# Altium PCB ddrlegobrick.PcbDoc (part 1 of 2)
Units mm, origin at the board's own origin, x right, y up, seen from the top; angles counter-clockwise.
Board outline 62 x 30 mm, 4 copper layers (TOP_PWR, POWER, SHIELD_GND, SIGNAL), stack 0.603 mm thick; 97 components, 81 nets, 416 pads, 74 vias.
Unrouted connection lines stored in the file: 270.
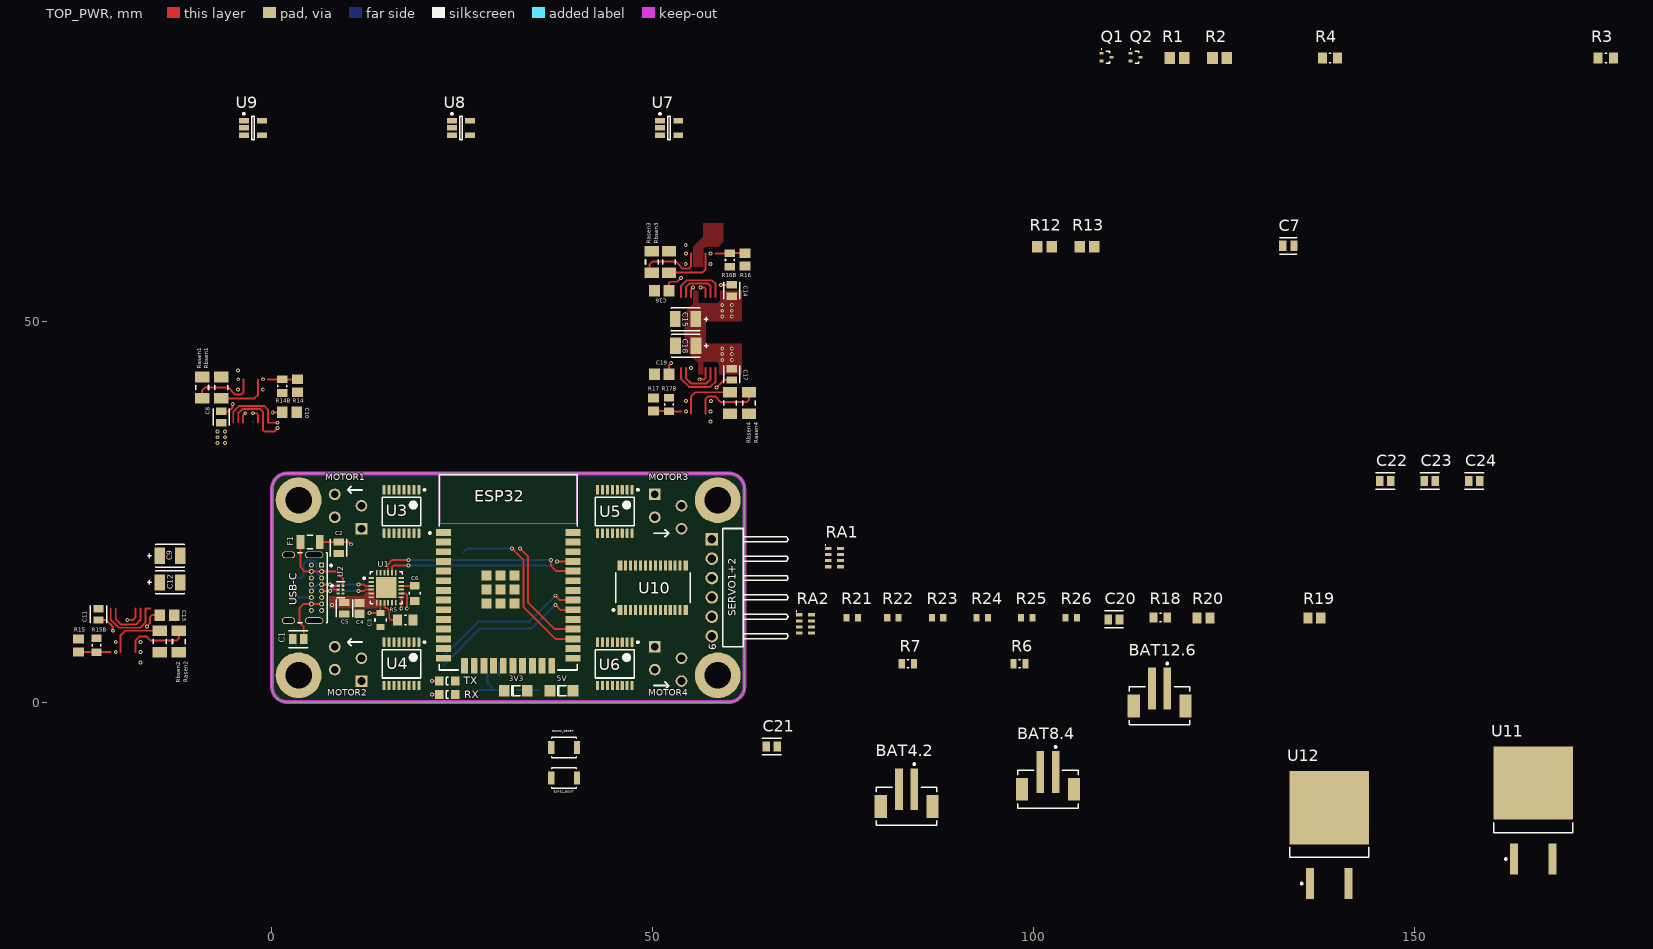
[diagram p0: TOP_PWR view]
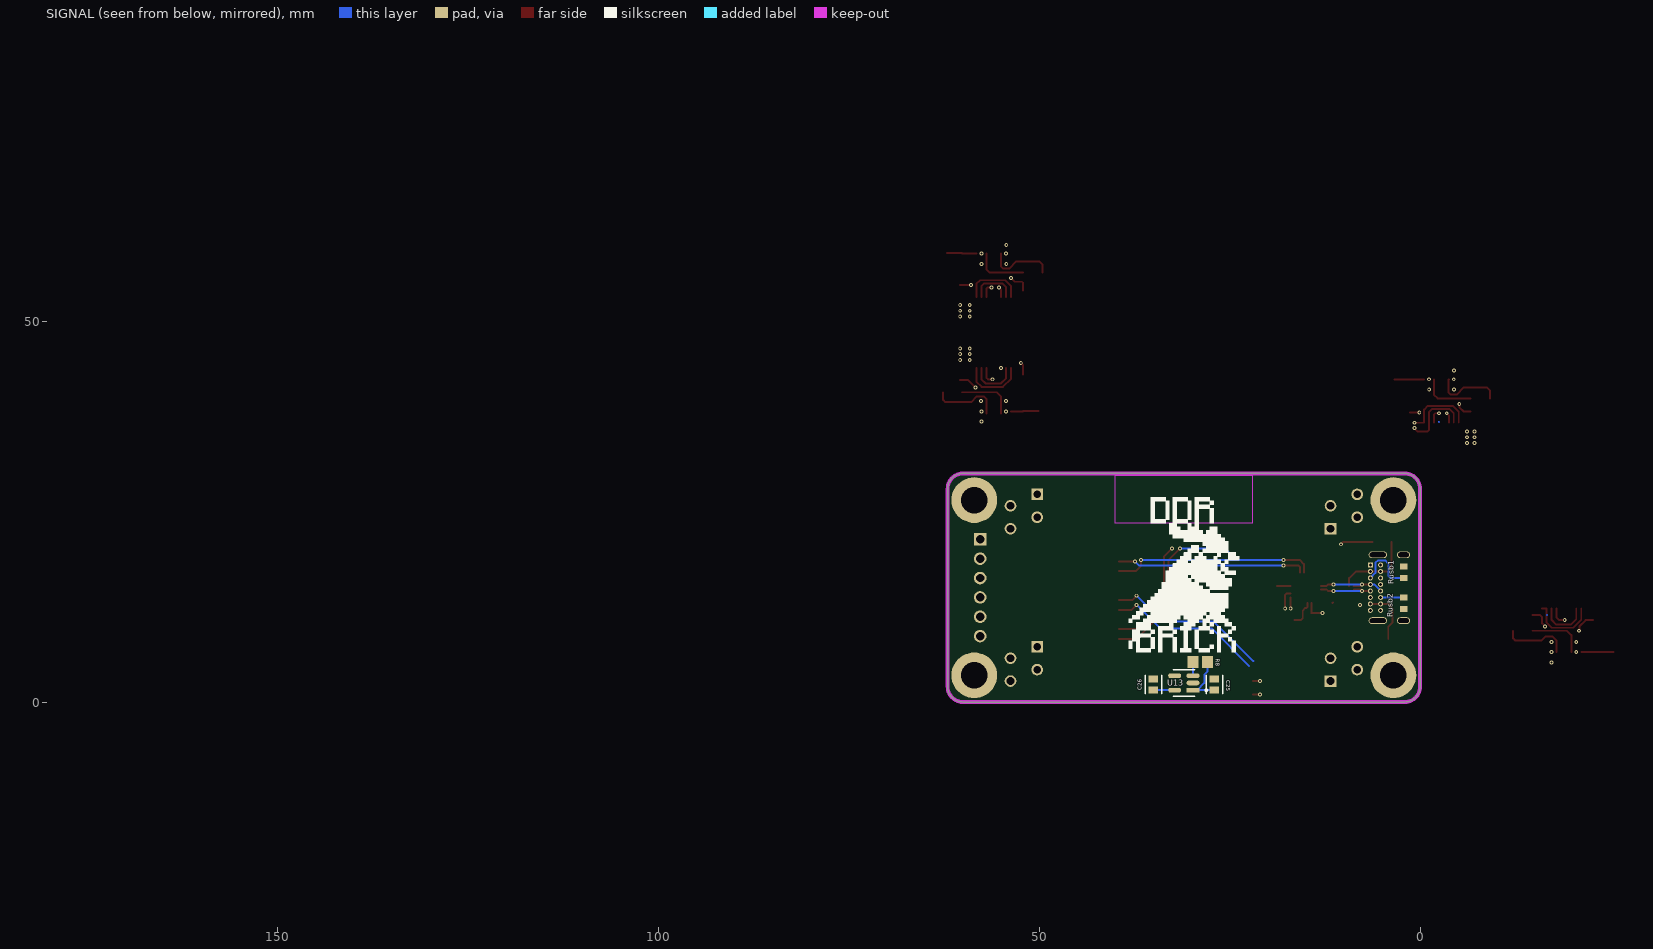
[diagram p1: SIGNAL view, seen from below]
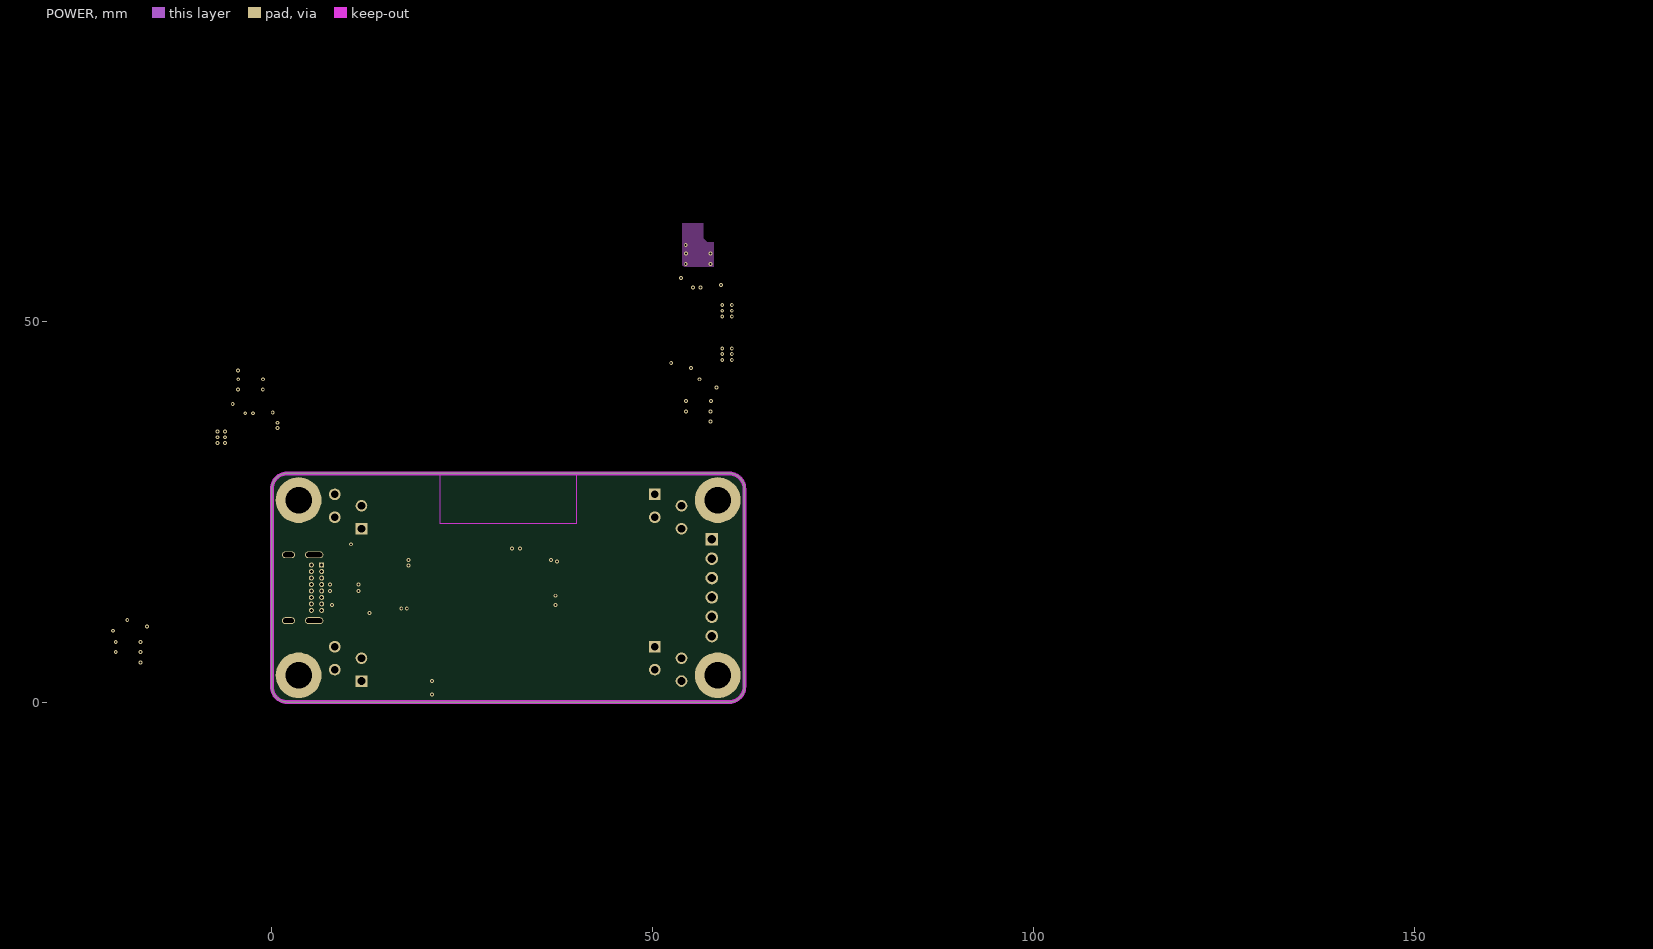
[diagram p2: POWER]
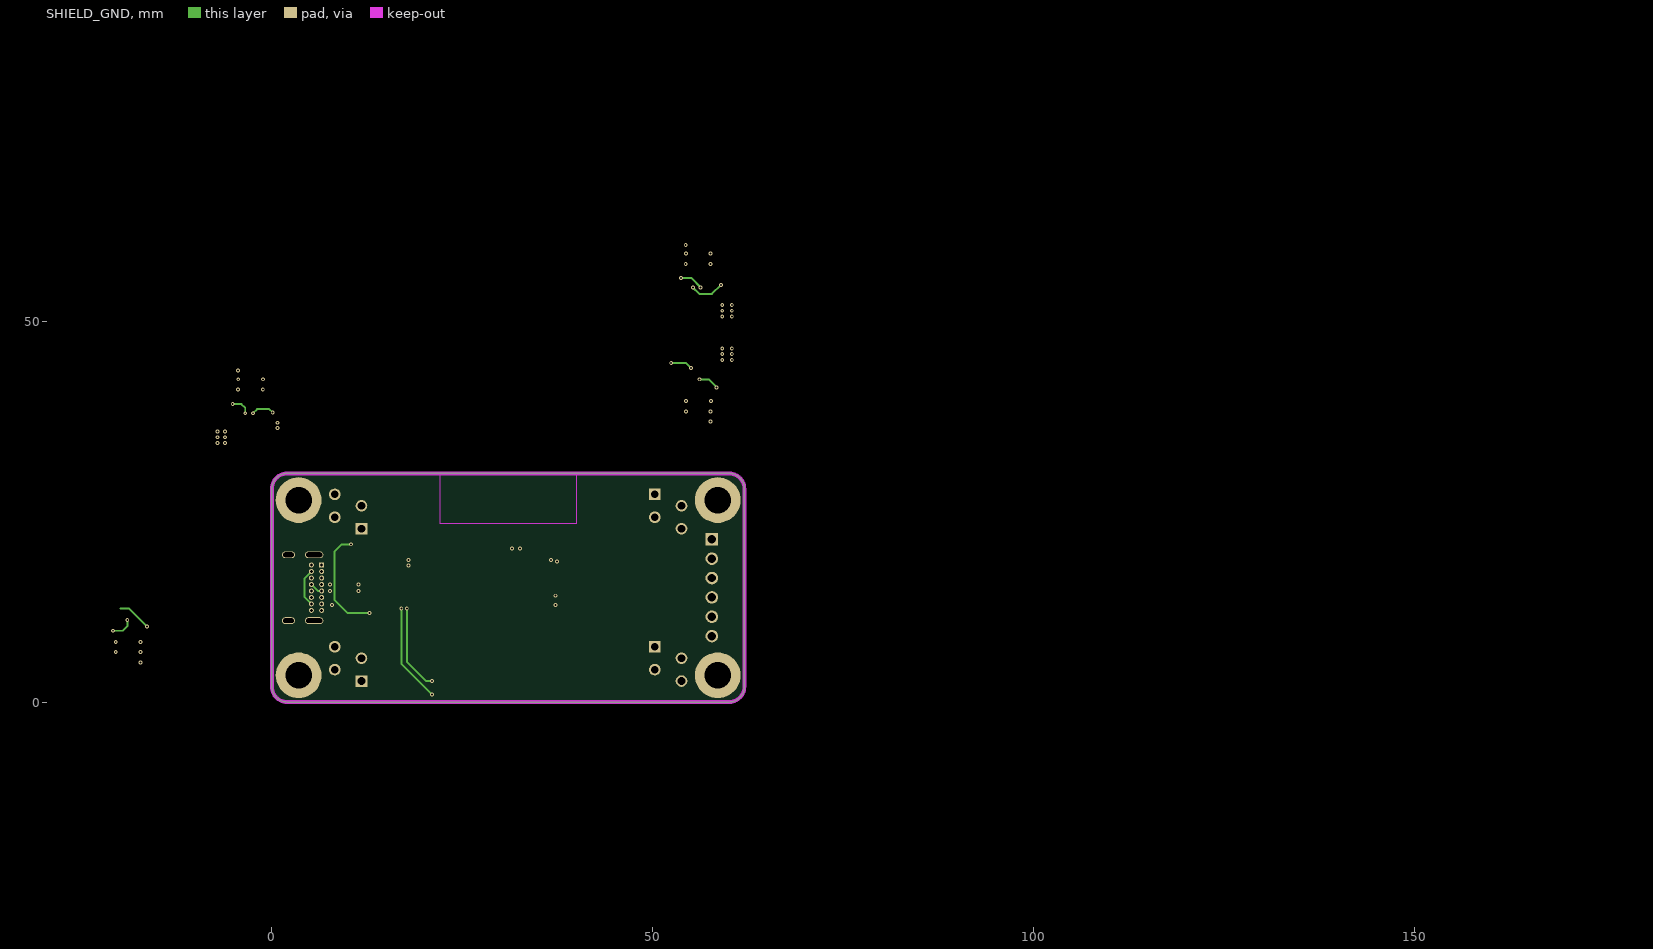
[diagram p3: SHIELD_GND]

## Layer stack, top to bottom
Top Solder: solder mask 0.0102, Solder Resist, Dk 3.5
TOP_PWR: signal copper 0.0356
Dielectric 2: prepreg 0.0711, PP-006, Dk 4.1
POWER: signal copper 0.035
Dielectric 1: dielectric 0.32, FR-4, Dk 4.8
SHIELD_GND: signal copper 0.035
Dielectric 3: prepreg 0.0711, PP-006, Dk 4.1
SIGNAL: signal copper 0.0356
Bottom Solder: solder mask 0.0102, Solder Resist, Dk 3.5

## Board outline
2,30 ccw(c2,28) 0,28 0,2 ccw(c2,2) 2,0 60,0 ccw(c60,2) 62,2 62,28 ccw(c60,28) 60,30

## Design rules (kind name [scope] priority, off if disabled: settings)
Clearance [All] p1: gap=0.127 ignorepadtopadclearanceinfootprint=FALSE
PolygonConnect [All] p1: connectstyle=Direct reliefconductorwidth=0.254 reliefentries=4 polygonreliefangle="90 Angle" airgapwidth=0.254
RoutingVias [All] p1: holewidth=0.711 width=1.27 viastyle="Through Hole" minholewidth=0.711 minwidth=1.27 maxholewidth=0.711 maxwidth=1.27
SolderMaskExpansion [All] p1: expansion=0.102 istentingtop=FALSE
Width [All] p1: maxlimit=3 minlimit=0.127 preferedwidth=0.254 midlayer1_minwidth=0.254 midlayer1_maxwidth=0.254 midlayer2_minwidth=0.254 midlayer2_maxwidth=0.254 minimp=50.000000 maximp=50.000000 favimp=50.000000
30 further rules are at their usual default settings.

## Classes and differential pairs
component class SERVO_DRIVER: C20 R18 R19 R20 R21 R22 R23 R24 R25 R26 RA1 RA2 U10
component class CONN: MOTOR1 MOTOR2 MOTOR3 MOTOR4 SERVO1+2
component class USB-ESP32: 3V3 5V C1 C2 C3 C4 C5 C6 C25 C26 F1 Q1 Q2 R1 R2 R3 R4 R5 R6 R7 R8 Rusb1 Rusb2 RX TX U1 U2 U13 USB-C
component class MOTOR_DRIVER: C8 C9 C10 C11 C12 C13 C14 C15 C16 C17 C18 C19 R14 R14B R15 R15B R16 R16B R17 R17B Rasen1 Rasen2 Rasen3 Rasen4 Rbsen1 Rbsen2 Rbsen3 Rbsen4 U3 U4 U5 U6
component class ESP32: C7 ESP32 ESP32_BOOT ESP32_RESET R12 R13
component class CHARGING: BAT4.2 BAT8.4 BAT12.6 C21 C22 C23 C24 U7 U8 U9 U11 U12

## Components (designator, comment, footprint, x,y, rotation, side; value= is the part's Value field where it differs from the comment)
3V3 "150120GS75000" 1206_A 32,1.5 r0 top
5V "150120GS75000" 1206_A 38,1.5 r0 top
BAT4.2 "B2B-PH-SM4-TB(LF)(SN)" JST-B2B-PH-SM4-TB-2_V 83.3,-13.7 r0 top
BAT8.4 "B2B-PH-SM4-TB(LF)(SN)" JST-B2B-PH-SM4-TB-2_V 101.85,-11.45 r0 top
BAT12.6 "B2B-PH-SM4-TB(LF)(SN)" JST-B2B-PH-SM4-TB-2_V 116.5,-0.5 r0 top
C1 "10uF 25V 0805" FP-GRM21B-0_15-IPC_C 3.449,8.25 r180 top
C2 "0.1uF 50V 0805" FP-C0805C-DN-MFG 8.75,20.25 r270 top value="0.10 μF"
C3 "4.7uF 50V 0805" FP-C2012-125-MFG 14.25,10.75 r270 top value=4.7uF
C4 "1uF 16V 0805" CAPC2013X145X50LL20T25 11.5,12.3 r90 top
C5 "0.1uF 50V 0805" FP-C0805C-DN-MFG 9.5,12.3 r270 top value="0.10 μF"
C6 "4.7uF 16V 0805" FP-0805-L_2_01_0_2-W_1_25-MFG 18.75,14.25 r270 top
C7 "10uF 10V 0805" FP-C0805C-DG-MFG 133.395,59.864 r0 top value=10uF
C8 "10nF 25V 0805" FP-C0805C-DN-MFG -6.65,37.4 r90 top value="10,000 pF"
C9 "10uF 25V 3528" FP-T491B106K025AT-MFG -13.375,19.2 r180 top
C10 "2.2uF 25V 0805" CAPC2013X135X45ML10T25 2.3,38 r180 top
C11 "10nF 25V 0805" FP-C0805C-DN-MFG -22.775,11.5 r270 top value="10,000 pF"
C12 "10uF 25V 3528" FP-T491B106K025AT-MFG -13.375,15.7 r180 top
C13 "2.2uF 25V 0805" CAPC2013X135X45ML10T25 -13.775,11.4 r180 top
C14 "10nF 25V 0805" FP-C0805C-DN-MFG 60.35,54 r90 top value="10,000 pF"
C15 "10uF 25V 3528" FP-T491B106K025AT-MFG 54.275,50.25 r0 top
C16 "2.2uF 25V 0805" CAPC2013X135X45ML10T25 51.15,54 r0 top
C17 "10nF 25V 0805" FP-C0805C-DN-MFG 60.35,43 r270 top value="10,000 pF"
C18 "10uF 25V 3528" FP-T491B106K025AT-MFG 54.3,46.75 r0 top
C19 "2.2uF 25V 0805" CAPC2013X135X45ML10T25 51.15,43 r0 top
C20 "10uF 25V 0805" FP-GRM21B-0_15-IPC_C 110.5,10.85 r0 top
C21 "10uF 25V 0805" FP-GRM21B-0_15-IPC_C 65.6,-5.85 r0 top
C22 "10uF 25V 0805" FP-GRM21B-0_15-IPC_C 146.1,29 r0 top
C23 "10uF 25V 0805" FP-GRM21B-0_15-IPC_C 151.95,29 r0 top
C24 "10uF 25V 0805" FP-GRM21B-0_15-IPC_C 157.8,29 r0 top
C25 "10uF 16V 0805" FP-GRM21B-0_1-IPC_C 27,2.3 r90 bottom
C26 "10uF 16V 0805" FP-GRM21B-0_1-IPC_C 35,2.3 r90 bottom
ESP32 "ESP32-WROOM-32D" FP-ESP32-WROOM-32D-MFG 31,17 r0 top
ESP32_BOOT "B3U-1000P" FP-B3U-1000P-MFG 38.35,-9.95 r180 top
ESP32_RESET "B3U-1000P" FP-B3U-1000P-MFG 38.35,-5.95 r180 top
F1 "0437003.WR" FP-437-MFG 5,21 r0 top value=0.033Ω
MOTOR1 "PF_CONN" PF_CONN 10,25 r270 top
MOTOR2 "PF_CONN" PF_CONN 10,5 r270 top
MOTOR3 "PF_CONN" PF_CONN 52,25 r90 top
MOTOR4 "PF_CONN" PF_CONN 52,5 r90 top
Q1 "MMBT2222ATT1G" ONSC-SC-75-3-463-01_V 109.519,84.629 r0 top
Q2 "MMBT2222ATT1G" ONSC-SC-75-3-463-01_V 113.329,84.629 r0 top
R1 "10K 5% 0805" RESC2013X60X40ML20T25 118.79,84.502 r0 top
R2 "10K 5% 0805" RESC2013X60X40ML20T25 124.378,84.502 r0 top
R3 "1k 5% 0805" RESC2013X60X35ML10T20 175.051,84.502 r0 top
R4 "1k 5% 0805" RESC2013X60X35ML10T20 138.856,84.502 r0 top
R5 "4k7 1% 0805" YAGO-RC0805_M 17.5,10.75 r0 top
R6 "330R 0805" RESC2013X60X35LL10T20 98.1,5 r0 top
R7 "330R 0805" RESC2013X60X35LL10T20 83.45,5 r0 top
R8 "10K 5% 0805" RESC2013X60X40ML20T25 28.85,5.25 r180 bottom
R12 "10K 5% 0805" RESC2013X60X40ML20T25 101.391,59.737 r0 top
R13 "10K 5% 0805" RESC2013X60X40ML20T25 106.979,59.737 r0 top
R14 "220R 5% 0805" RESC2013X60X40NL20T25 3.35,41.5 r90 top
R14B "10k 5% 0805" RESC2013X60X35NL10T20 1.35,41.45 r90 top
R15 "220R 5% 0805" RESC2013X60X40NL20T25 -25.375,7.4 r270 top
R15B "10k 5% 0805" RESC2013X60X35NL10T20 -23.025,7.45 r270 top
R16 "220R 5% 0805" RESC2013X60X40NL20T25 62.1,58.05 r90 top
R16B "10k 5% 0805" RESC2013X60X35NL10T20 60.1,58 r90 top
R17 "220R 5% 0805" RESC2013X60X40NL20T25 50.1,39.05 r270 top
R17B "10k 5% 0805" RESC2013X60X35NL10T20 52.1,39.05 r270 top
R18 "10K 5% 0805" RESC2013X60X35NL10T20 116.6,11.1 r0 top
R19 "220R 5% 0805" RESC2013X60X40NL20T25 136.8,11.05 r0 top
R20 "220R 5% 0805" RESC2013X60X40NL20T25 122.25,11.05 r0 top
R21 "0R 0603 0.1W" RESC1608X55X25ML10T15 76.15,11.05 r0 top
R22 "0R 0603 0.1W" RESC1608X55X25ML10T15 81.5,11.05 r0 top
R23 "0R 0603 0.1W" RESC1608X55X25ML10T15 87.35,11.05 r0 top
R24 "0R 0603 0.1W" RESC1608X55X25ML10T15 93.2,11.05 r0 top
R25 "0R 0603 0.1W" RESC1608X55X25ML10T15 99.05,11.05 r0 top
R26 "0R 0603 0.1W" RESC1608X55X25ML10T15 104.9,11.05 r0 top
RA1 "CAT16-103J4LF" BOUR-CAT16-103J4LF_L 73.8,18.95 r0 top
RA2 "CAT16-103J4LF" BOUR-CAT16-103J4LF_L 70,10.25 r0 top
Rasen1 "0.06 Ohm 1% 1206" RESC3216X89X51NL25T25 -9.15,41.25 r270 top
Rasen2 "0.06 Ohm 1% 1206" RESC3216X89X51NL25T25 -12.225,7.95 r90 top
Rasen3 "0.06 Ohm 1% 1206" RESC3216X89X51NL25T25 49.85,57.75 r270 top
Rasen4 "0.06 Ohm 1% 1206" RESC3216X89X51NL25T25 62.6,39.25 r90 top
Rbsen1 "0.06 Ohm 1% 1206" RESC3216X89X51NL25T25 -6.65,41.25 r270 top
Rbsen2 "0.06 Ohm 1% 1206" RESC3216X89X51NL25T25 -14.725,7.95 r90 top
Rbsen3 "0.06 Ohm 1% 1206" RESC3216X89X51NL25T25 52.1,57.75 r270 top
Rbsen4 "0.06 Ohm 1% 1206" RESC3216X89X51NL25T25 60.1,39.25 r90 top
Rusb1 "5K1 1% 0603" RESC1608X55X25ML10T15 2.165,17.025 r270 bottom
Rusb2 "5K1 1% 0603" RESC1608X55X25ML10T15 2.165,12.975 r90 bottom
RX "150080YS75000" 0805_A 23,1 r0 top
SERVO1+2 "61300611021" 61300611021 60.5,15 r90 top
TX "150080YS75000" 0805_A 23,2.75 r0 top
U1 "CP2104-F03-GM" FP-CP2104-F03-GM-MFG 15,15 r0 top
U2 "TPD4S012DRYR" FP-DRY0006A-MFG 9,14.75 r0 top
U3 "DRV8833PWR" PW0016A_L 17,25 r270 top
U4 "DRV8833PWR" PW0016A_L 17,5 r270 top
U5 "DRV8833PWR" PW0016A_L 45,25 r270 top
U6 "DRV8833PWR" PW0016A_L 45,5 r270 top
U7 "MCP73831T-3ACI/OT" SOT-23-OT5_M 52.124,75.345 r0 top
U8 "MCP73831T-3ACI/OT" SOT-23-OT5_M 24.819,75.345 r0 top
U9 "MCP73831T-3ACI/OT" SOT-23-OT5_M -2.486,75.345 r0 top
U10 "PCA9685PW,112" SOT361-1_V 50,15 r90 top
U11 "L7805CD2T-TR" TO-263_M 165.54,-14.25 r90 top
U12 "L7805CD2T-TR" TO-263_M 138.76,-17.475 r90 top
U13 "AP2112K-3.3TRG1" FP-SOT25-IPC_A 31,2.5 r0 bottom
USB-C "USB4085-GF-A" FP-USB4085-GF-A-MFG 2.5,15 r270 top

## Footprints (in the part's own frame and the unit in brackets; to place one, negate y for a bottom-side part, rotate by r counter-clockwise, add the part's x,y. Pads: shape width x height; smd on the part's side, far side on the other; paste and mask are expansions set on the pad)
0805_A [mm] "Chip LED, 2-Leads, Body 2.0x1.3mm, IPC Medium Density"
  rect 1.1x1.2 smd: 1(-1.05,0) 2(1.05,0)
  silkscreen extent -0.15,-0.5 0.15,0.5, body extent -1,-0.62 1,0.63, height 0.68
1206_A [mm] "Chip LED, 2-Leads, Body 3.2x1.6mm, IPC Medium Density"
  rect 1.4x1.5 smd: 1(-1.5,0) 2(1.5,0)
  silkscreen extent -0.5,-0.66 0.6,0.65, body extent -1.6,-0.8 1.6,0.8, height 0.68
61300611021 [mm] "Pin Header, pitch 2.54 mm, THT, Angled, single row, 6p"
  rect 1.65x1.65 hole 1.1: 1(6.35,2.77)
  round 1.65 hole 1.1: 2(3.81,2.77) 3(1.27,2.77) 4(-1.27,2.77) 5(-3.81,2.77) 6(-6.35,2.77)
  silkscreen extent -7.77,-7.27 7.77,1.35, body extent -7.62,-7.27 7.62,3.09, height 2.58
BOUR-CAT16-103J4LF_L [mm] "Chip Array, 8-Leads, Body 3.4x1.6mm, Pitch 0.8mm, IPC High Density"
  rect 0.9x0.4 smd: 1(-0.8,1.2) 2(-0.8,0.4) 3(-0.8,-0.4) 4(-0.8,-1.2) 5(0.8,-1.2) 6(0.8,-0.4) 7(0.8,0.4) 8(0.8,1.2)
  silkscreen extent -1.19,1.6 -1.09,1.7, body extent -0.95,-1.7 0.95,1.7, height 0.6
CAPC2013X135X45ML10T25 [mm] "Chip Capacitor, 2-Leads, Body 2.00x1.25mm, IPC Low Density"
  rect 1.4x1.5 smd: 1(-0.95,0) 2(0.95,0)
  body extent -1.05,-0.67 1.05,0.67, height 1.35
CAPC2013X145X50LL20T25 [mm] "Chip Capacitor, 2-Leads, Body 2.00x1.25mm, IPC High Density"
  rect 1.1x1.35 smd: 1(-0.7,0) 2(0.7,0)
  body extent -1.1,-0.72 1.1,0.72, height 1.45
FP-437-MFG [mm]
  rect 1x1.8 smd paste+0 mask+0: 1(-1.25,0) 2(1.25,0)
  silkscreen extent -0.38,-0.86 0.38,0.86, body extent -1.85,-1 1.85,1, height 0.25
FP-0805-L_2_01_0_2-W_1_25-MFG [mm]
  rect 1x1.25 smd paste+0 mask+0: 1(-1,0) 2(1,0)
  silkscreen extent -0.13,-0.72 0.13,0.72, body extent -1,-0.63 1,0.63, height 1.52
FP-B3U-1000P-MFG [mm]
  rect 0.8x1.7 smd paste+0 mask+0: 1(-1.7,0) 2(1.7,0)
  silkscreen extent -1.6,-1.35 1.6,1.35, body extent -2.2,-1.45 2.2,1.45, height 0.25
FP-C0805C-DG-MFG [mm]
  rect 0.95x1.35 smd paste+0 mask+0: 1(-0.75,0) 2(0.75,0)
  silkscreen extent -1.11,-1.08 1.1,1.07, body extent -1.4,-0.85 1.4,0.85, height 0.25
FP-C0805C-DN-MFG [mm]
  rect 0.95x1.35 smd paste+0 mask+0: 1(-0.75,0) 2(0.75,0)
  silkscreen extent -1.1,-1.07 1.1,1.07, body extent -1.4,-0.85 1.4,0.85, height 0.25
FP-C2012-125-MFG [mm]
  rect 0.8x1.05 smd paste+0 mask+0: 1(-0.925,0) 2(0.925,0)
  silkscreen extent -0.15,-0.72 0.15,0.72, body extent -1.01,-0.72 0.99,0.73, height 1.45
FP-CP2104-F03-GM-MFG [mm]
  rect 0.7x0.25 smd paste+0 mask+0: 1(-1.975,1.25) 2(-1.975,0.75) 3(-1.975,0.25) 4(-1.975,-0.25) 5(-1.975,-0.75) 6(-1.975,-1.25) 13(1.975,-1.25) 14(1.975,-0.75) 15(1.975,-0.25) 16(1.975,0.25) 17(1.975,0.75) 18(1.975,1.25)
  rect 0.25x0.7 smd paste+0 mask+0: 7(-1.25,-1.975) 8(-0.75,-1.975) 9(-0.25,-1.975) 10(0.25,-1.975) 11(0.75,-1.975) 12(1.25,-1.975) 19(1.25,1.975) 20(0.75,1.975) 21(0.25,1.975) 22(-0.25,1.975) 23(-0.75,1.975) 24(-1.25,1.975)
  rect 2.75x2.75 smd paste-1000 mask+0: 25(0,0)
  silkscreen extent -3.02,-2.07 2.08,2.07, body extent -2.42,-2.42 2.43,2.42, height 0.25
FP-DRY0006A-MFG [mm]
  rrect67% 0.45x0.3 smd paste-1000 mask-1000: 1(-0.275,0.5)
  rrect67% 0.4x0.3 smd paste-1000 mask-1000: 2(-0.3,0) 3(-0.3,-0.5) 4(0.3,-0.5) 5(0.3,0) 6(0.3,0.5)
  silkscreen extent -1.25,-1.05 0.53,1.05, body extent -0.5,-0.72 0.5,0.72, height 0.6
FP-ESP32-WROOM-32D-MFG [mm]
  rect 2x0.9 smd paste+0 mask+0: 1(-8.5,5.26) 2(-8.5,3.99) 3(-8.5,2.72) 4(-8.5,1.45) 5(-8.5,0.18) 6(-8.5,-1.09) 7(-8.5,-2.36) 8(-8.5,-3.63) 9(-8.5,-4.9) 10(-8.5,-6.17) 11(-8.5,-7.44) 12(-8.5,-8.71) 13(-8.5,-9.98) 14(-8.5,-11.25) 25(8.5,-11.25) 26(8.5,-9.98) 27(8.5,-8.71) 28(8.5,-7.44) 29(8.5,-6.17) 30(8.5,-4.9) 31(8.5,-3.63) 32(8.5,-2.36) 33(8.5,-1.09) 34(8.5,0.18) 35(8.5,1.45) 36(8.5,2.72) 37(8.5,3.99) 38(8.5,5.26)
  rect 0.9x2 smd paste+0 mask+0: 15(-5.715,-12.25) 16(-4.445,-12.25) 17(-3.175,-12.25) 18(-1.905,-12.25) 19(-0.635,-12.25) 20(0.635,-12.25) 21(1.905,-12.25) 22(3.175,-12.25) 23(4.445,-12.25) 24(5.715,-12.25)
  rect 1.33x1.33 smd paste+0 mask+0: 39(-2.835,-4.075) 39(-2.835,-2.24) 39(-2.835,-0.405) 39(-1,-4.075) 39(-1,-2.24) 39(-1,-0.405) 39(0.835,-4.075) 39(0.835,-2.24) 39(0.835,-0.405)
  Keep-Out Layer region: -9,6.45 9,6.45 9,12.75 -9,12.75
  Keep-Out Layer region: -9,6.45 9,6.45 9,12.75 -9,12.75
  silkscreen extent -10.4,-12.8 9.05,12.8, body extent -9.6,-13.35 9.6,12.9, height 0.25
FP-GRM21B-0_1-IPC_C [mm]
  rect 0.958x1.262 smd paste+0 mask+0: 1(-0.727,0) 2(0.727,0)
  silkscreen extent -1.21,-1.07 1.21,1.07, body extent -1,-0.63 1,0.63, height 1.35
FP-GRM21B-0_15-IPC_C [mm]
  rect 1.006x1.308 smd paste+0 mask+0: 1(-0.726,0) 2(0.726,0)
  silkscreen extent -1.23,-1.1 1.23,1.1, body extent -1.33,-0.8 1.33,0.8, height 0.25
FP-SOT25-IPC_A [mm]
  rect 1.707x0.616 smd paste+0 mask+0: 1(-1.201,0.95)
  rrect100% 1.707x0.616 smd paste+0 mask+0: 2(-1.201,0) 3(-1.201,-0.95) 4(1.201,-0.95) 5(1.201,0.95)
  silkscreen extent -3.08,-1.75 1.4,1.75, body extent -1.4,-1.47 1.4,1.45, height 1.45
FP-T491B106K025AT-MFG [mm]
  rect 1.42x2.13 smd paste+0 mask+0: 1(-1.35,0) 2(1.35,0)
  silkscreen extent -1.85,-1.5 2.95,1.5, body extent -2.18,-1.62 2.18,1.62, height 0.25
FP-USB4085-GF-A-MFG [mm]
  rrect100% 0.9x2.4 hole 2.1 slot 0.6 at 0 deg paste-1000 mask+0: 1(-4.325,3.045) 2(4.325,3.045)
  rrect100% 0.9x1.7 hole 1.4 slot 0.6 at 0 deg paste-1000 mask+0: 3(-4.325,-0.335) 4(4.325,-0.335)
  rect 0.65x0.65 hole 0.4 paste-1000 mask+0: A1(-2.975,4.025)
  round 0.65 hole 0.4 paste-1000 mask+0: A4(-2.125,4.025) A5(-1.275,4.025) A6(-0.425,4.025) A7(0.425,4.025) A8(1.275,4.025) A9(2.125,4.025) A12(2.975,4.025) B1(2.975,2.675) B4(2.125,2.675) B5(1.275,2.675) B6(0.425,2.675) B7(-0.425,2.675) B8(-1.275,2.675) B9(-2.125,2.675) B12(-2.975,2.675)
  silkscreen extent -4.57,0.89 4.57,5.4, body extent -4.87,-4.83 4.87,4.83, height 0.25
JST-B2B-PH-SM4-TB-2_V [mm] "SMD, 2-Leads, Body 7.95x5mm, Pitch 2mm"
  rect 1x5.5 smd: 1(1,2.25) 2(-1,2.25)
  rect 1.6x3 smd: MP1(3.4,0) MP2(-3.4,0)
  silkscreen extent -3.98,-2.5 3.98,5.67, body extent -3.97,-2.5 3.97,4.5, height 6.6
ONSC-SC-75-3-463-01_V [mil] "SOT23, 3-Leads, Body 1.6x0.8mm, Pitch 0.5mm"
  rect 20x14.02 smd: 1(-25.49,19.68) 2(-25.49,-19.69) 3(25.49,0)
  silkscreen extent -27,-31 16,44, body extent -16,-31 16,31, height 35
PF_CONN [mm] "PF connector based on the RC brick design"
  round 1.524 hole 1: C1(-0.75,1.75) C2(0.75,-1.75) GND(-2.25,-1.75)
  rect 1.524x1.524 hole 1: VCC(2.25,1.75)
  silkscreen extent -3.3,-0.05 -2.4,1.85, body extent -3.52,-3.02 3.52,3.02, height 8.38
PW0016A_L [mm] "SOP, 16-Leads, Body 5.1x4.5mm, Pitch 0.65mm, IPC High Density"
  rrect25% 1.2x0.4 smd: 1(-2.85,2.275) 2(-2.85,1.625) 3(-2.85,0.975) 4(-2.85,0.325) 5(-2.85,-0.325) 6(-2.85,-0.975) 7(-2.85,-1.625) 8(-2.85,-2.275) 9(2.85,-2.275) 10(2.85,-1.625) 11(2.85,-0.975) 12(2.85,-0.325) 13(2.85,0.325) 14(2.85,0.975) 15(2.85,1.625) 16(2.85,2.275)
  silkscreen extent -2.97,-2.55 1.85,3.15, body extent -3.21,-2.5 3.21,2.5, height 1
RESC1608X55X25ML10T15 [mm] "Chip Resistor, 2-Leads, Body 1.60x0.80mm, IPC Low Density"
  rect 0.8x1 smd: 1(-0.75,0) 2(0.75,0)
  body extent -0.85,-0.45 0.85,0.45, height 0.55
RESC2013X60X35LL10T20 [mm] "Chip Resistor, 2-Leads, Body 2.1x1.35mm, IPC High Density"
  rect 0.8x1.25 smd: 1(-0.8,0) 2(0.8,0)
  silkscreen extent -0.1,-0.53 0.1,0.53, body extent -1.05,-0.67 1.05,0.68, height 0.6
RESC2013X60X35ML10T20 [mm] "Chip Resistor, 2-Leads, Body 2.1x1.35mm, IPC Low Density"
  rect 1.2x1.45 smd: 1(-1,0) 2(1,0)
  silkscreen extent -0.1,-0.63 0.1,0.63, body extent -1.05,-0.68 1.05,0.67, height 0.6
RESC2013X60X35NL10T20 [mm] "Chip Resistor, 2-Leads, Body 2.1x1.35mm, IPC Medium Density"
  rect 1x1.35 smd: 1(-0.9,0) 2(0.9,0)
  silkscreen extent -0.1,-0.58 0.1,0.58, body extent -1.05,-0.68 1.05,0.67, height 0.6
RESC2013X60X40ML20T25 [mm] "Chip Resistor, 2-Leads, Body 2.00x1.25mm, IPC Low Density"
  rect 1.4x1.55 smd: 1(-0.95,0) 2(0.95,0)
  body extent -1.1,-0.72 1.1,0.72, height 0.6
RESC2013X60X40NL20T25 [mm] "Chip Resistor, 2-Leads, Body 2.00x1.25mm, IPC Medium Density"
  rect 1.2x1.45 smd: 1(-0.85,0) 2(0.85,0)
  body extent -1.1,-0.72 1.1,0.72, height 0.6
RESC3216X89X51NL25T25 [mm] "Chip Resistor, 2-Leads, Body 3.20x1.60mm, IPC Medium Density"
  rect 1.4x1.85 smd: 1(-1.4,0) 2(1.4,0)
  silkscreen extent -0.3,-0.82 0.3,0.82, body extent -1.73,-0.92 1.73,0.92, height 0.89
SOT361-1_V [mm] "SOP, 28-Leads, Body 9.7x4.4mm, Pitch 0.65mm, NXP Recommended"
  rect 1.35x0.6 smd: 1(-2.925,4.325) 14(-2.925,-4.325) 15(2.925,-4.325) 28(2.925,4.325)
  rect 1.35x0.4 smd: 2(-2.925,3.575) 3(-2.925,2.925) 4(-2.925,2.275) 5(-2.925,1.625) 6(-2.925,0.975) 7(-2.925,0.325) 8(-2.925,-0.325) 9(-2.925,-0.975) 10(-2.925,-1.625) 11(-2.925,-2.275) 12(-2.925,-2.925) 13(-2.925,-3.575) 16(2.925,-3.575) 17(2.925,-2.925) 18(2.925,-2.275) 19(2.925,-1.625) 20(2.925,-0.975) 21(2.925,-0.325) 22(2.925,0.325) 23(2.925,0.975) 24(2.925,1.625) 25(2.925,2.275) 26(2.925,2.925) 27(2.925,3.575)
  silkscreen extent -3.05,-4.9 1.96,5.3, body extent -2.2,-4.85 2.2,4.85, height 1.1
SOT-23-OT5_M [mm] "SOT23, 5-Leads, Body 2.9x1.7mm, Pitch 0.95mm, Lead Span 2.8mm, IPC Low Density"
  rect 1.3x0.7 smd: 1(-1.2,0.95) 2(-1.2,0) 3(-1.2,-0.95) 4(1.2,-0.95) 5(1.2,0.95)
  silkscreen extent -1.32,-1.55 0.15,1.97, body extent -0.9,-1.55 0.9,1.55, height 1.45
TO-263_M [mm] "D2-PAK, 4-Leads, Body 9.2x10.2mm, Pitch 2.54mm, Lead Span 15.4mm, IPC Low Density"
  rect 4.1x1.05 smd: 1(-6.35,2.54) 3(-6.35,-2.54)
  rect 9.6x10.45 smd: 4(3.6,0)
  silkscreen extent -6.47,-5.2 -1.6,5.2, body extent -2.9,-5.2 6.45,5.2, height 4.6
YAGO-RC0805_M [mm] "Chip Resistor, 2-Leads, Body 2.00x1.25mm, IPC Low Density"
  rect 1.2x1.45 smd: 1(-1,0) 2(1,0)
  silkscreen extent -0.1,-0.63 0.1,0.63, body extent -1,-0.62 1,0.63, height 0.6

## Part data
3V3 5V: library part CMP-1426-00014-1, "SMD mono-color Chip LED, WL-SMCW, Green", Color=Green, Manufacturer="Wuerth Elektronik", ComponentLink1Description="Manufacturer URL", ComponentLink1URL=http://www.we-online.com, ComponentLink2Description=Datasheet, ComponentLink2URL=http://katalog.we-online.com/led/datasheet/150120GS75000.pdf, PackageReference=1206_A, PartNumber=150120GS75000
BAT4.2 BAT8.4 BAT12.6: library part CMP-2000-05163-1, "Male Header, Pitch 2 mm, 1 x 2 Position, Height 6.6 mm, RoHS, Tape and Reel", Manufacturer=JST, Datasheet URL=https://ciiva.com/datasheet-click-26894756?src=ciiva&sig=90099765, Datasheet Version=Dec-12, Manufacturer URL=http://www.jst.com/home2.html, No of Positions=2, Pitch=2mm, Style/Orientation=StraightHeader/Plug, Termination=Crimp, Type=ShroudedHeader
C1 C20 C21 C22 C23 C24: library part CMP-2007-03541-2, "Chip Multilayer Ceramic Capacitors for General Purpose, 0805, 10uF, X5R, 15%, 10%, 25V", Capacitance=10uF, Case Code (Imperial)=0805, Case Code (Metric)=2012, Dielectric=X5R, Max Operating Temperature=85°C, Min Operating Temperature=-55°C, Package Quantity=1, Tolerance=10%, Voltage=25V, Case/Package=0805, Depth=1.25mm, Height=1.25mm, Lead Free="Lead Free", Length=2mm, Material=Ceramic, Mount="Surface Mount", Packaging="Tape and Reel", Radiation Hardening=No, Termination=SMD/SMT, Thickness=0.053inch, Voltage Rating=25V, Voltage Rating (DC)=25V, Width=0.049inch
C2 C5: library part CMP-2007-00279-2, "CAP CER 0.1UF 50V X7R 0805", Capacitance="0.10 μF", Manufacturer=KEMET, Manufacturer Part Number=C0805C104K5RACTU, Package=C0805C-DN, Temperature="-55°C to +125°C", Temperature Characteristic=X7R, Temperature Coefficient=30ppm/°C, Temperature Range High=+125°C, Temperature Range Low=-55°C, Tolerance=0.1, Voltage Rating="50 V", Automotive=No, Category=Cap, ComponentLink2Description=Datasheet, ComponentLink2URL=https://content.kemet.com/datasheets/KEM_C1003_C0G_SMD.pdf, Device Class L1="Passive Components", Device Class L2=Capacitors, Device Class L3="Ceramic Capacitors", Digikey Description="CAP CER 0.1UF 50V X7R 0805", Height=0.88mm, Ipc Land Pattern Name=CAPC200125X78, Lead Free=Yes, Material=Ceramic, Mouser Description="Cap Ceramic 0.1uF 50V X7R 10% SMD 2.0 x 1.2 mm 125 C Paper T/R", Octopart=https://octopart.com/c0805c104k5ractu-kemet-143926, RoHS=TRUE
C3: library part CMP-08246-000007-1, "CAP CER 4.7UF 50V X5R 0805", Capacitance=4.7uF, Manufacturer="TDK Corporation", Manufacturer Part Number=C2012X5R1H475K125AB, Package=C2012-125, Temperature="-55°C to +85°C", Temperature Characteristic=X5R, Temperature Coefficient=15%, Temperature Range High=+85°C, Temperature Range Low=-55°C, Tolerance=10%, Voltage Rating=50V, Automotive=No, Category=Cap, ComponentLink2Description=Datasheet, ComponentLink2URL=https://product.tdk.com/info/en/catalog/datasheets/mlcc_commercial_general_en.pdf, Device Class L1="Passive Components", Device Class L2=Capacitors, Device Class L3="Ceramic Capacitors", Digikey Description="CAP CER 4.7UF 50V X5R 0805", Height=1.45mm, Lead Free=Yes, Material=Ceramic, Mouser Description="Multilayer Ceramic Capacitors MLCC - SMD/SMT 0805 4.7uF 50volts X5R 10%", Octopart=https://octopart.com/c2012x5r1h475k125ab-tdk-25947720, RoHS=TRUE
C4: library part CMP-1036-04746-2, Manufacturer=Kemet, Part Number=C0805C105K4PACTU
C6: library part CMP-2007-04518-2, "General Purpose Ceramic Capacitor, 0805, 4.7uF, 10%, X7R, 15%, 16V", Capacitance=4.7uF, Case Code (Imperial)=0805, Case Code (Metric)=2012, Dielectric=X7R, Max Operating Temperature=125°C, Min Operating Temperature=-55°C, Package Quantity=1, Tolerance=10%, Voltage=10V, Voltage Rating=16V, Case/Package=0805, Construction=Flat, Contact Plating=Tin, Depth=1.25mm, Dissipation Factor=3.5%, Height=1.52mm, Lead Free="Lead Free", Length=2.01mm, Mount="Surface Mount", Number of Pins=2, Packaging="Tape and Reel", Radiation Hardening=No, REACH SVHC="No SVHC", RoHS Compliant=Yes, Series=-, Termination=SMD/SMT, Thickness=0.06inch, Voltage Rating (DC)=16V, Width=0.049inch
C7: library part CMP-2007-03243-2, "CAP CER 10UF 10V X5R 0805", 3DS Part Number=220-00001, Capacitance=10uF, Manufacturer=Kemet, Manufacturer Part Number=C0805C106K8PACTU, Package=C0805C-DG, Temperature="-55°C to +85°C", Temperature Characteristic=X5R, Temperature Coefficient=15%, Temperature Range High=+85°C, Temperature Range Low=-55°C, Tolerance=10%, Voltage=10V, Automotive=No, Category=Cap, ComponentLink2Description=Datasheet, ComponentLink2URL=https://content.kemet.com/datasheets/KEM_C1006_X5R_SMD.pdf, Device Class L1="Passive Components", Device Class L2=Capacitors, Device Class L3="Ceramic Capacitors", Digikey Description="CAP CER 10UF 10V X5R 0805", Height=1.4mm, Ipc Land Pattern Name=CAPC200125X125, Lead Free=Yes, Material=Ceramic, Mouser Description="CAP CER 10UF 10V X5R 0805", Octopart=https://octopart.com/c0805c106k8pactu-kemet-98697, RoHS=TRUE, Voltage Rating=10V
C8 C11 C14 C17: library part CMP-2007-00493-2, "CAP CER 10000PF 25V 5% NP0 0805", Capacitance="10,000 pF", Manufacturer=KEMET, Manufacturer Part Number=C0805C103J3GACTU, Package=C0805C-DN, Temperature="-55°C to +125°C", Temperature Characteristic=C0G, Temperature Coefficient=30ppm/°C, Temperature Range High=+125°C, Temperature Range Low=-55°C, Tolerance=0.05, Voltage Rating="25 V", Automotive=No, Category=Cap, ComponentLink2Description=Datasheet, ComponentLink2URL=https://content.kemet.com/datasheets/KEM_C1003_C0G_SMD.pdf, Device Class L1="Passive Components", Device Class L2=Capacitors, Device Class L3="Ceramic Capacitors", Digikey Description="CAP CER 10000PF 25V 5% NP0 0805", Height=0.88mm, Ipc Land Pattern Name=CAPC200125X78, Lead Free=Yes, Material=Ceramic, Mouser Description="Multilayer Ceramic Capacitors MLCC - SMD/SMT 25volts 10000pF 5% C0G", Octopart=https://octopart.com/c0805c103j3gactu-kemet-12563663, RoHS=TRUE
C9 C12 C15 C18: library part CMP-03017-000036-1, "CAP TANT 10UF 10% 25V 1411", Capacitance=10uF, Case Code (Imperial)=1411, Case Code (Metric)=3528, Dielectric Material=Tantalum, ESR (Equivalent Series Resistance)=3R, Leakage Current=2.5uA, Max Operating Temperature=125°C, Min Operating Temperature=-55°C, Package Quantity=1, Ripple Current=168mA, Tolerance=10%, Voltage=25V, Case/Package=1411, Construction=Flat, Depth=2.8mm, Dissipation Factor=8%, Features="General Purpose", Height=1.9mm, Height - Seated (Max)=0.083inch, Lead Free="Lead Free", Length=3.5mm, Life (Hours)=2000Hour, Mount="Surface Mount", Number of Pins=2, Packaging="Tape and Reel", Polarity=Polar, Radiation Hardening=No, REACH SVHC="No SVHC", RoHS Compliant=Yes, Series=T491, Termination=SMD/SMT, Voltage Rating=25V, Voltage Rating (DC)=25V, Width=0.11inch
C10 C13 C16 C19: library part CMP-2007-03522-1, Manufacturer=Murata, Part Number=GRM21BF51E225ZA01L
C25 C26: library part CMP-2007-03453-2, "Chip Multilayer Ceramic Capacitors for General Purpose, 0805, 10uF, X5R, 15%, 10%, 16V", Capacitance=10uF, Case Code (Imperial)=0805, Case Code (Metric)=2012, Dielectric=X5R, Max Operating Temperature=85°C, Min Operating Temperature=-55°C, Package Quantity=1, Tolerance=10%, Voltage=16V, Case/Package=0805, Depth=1.25mm, Height=1.25mm, Lead Free="Lead Free", Length=2mm, Material=Ceramic, Mount="Surface Mount", Packaging="Tape and Reel", Radiation Hardening=No, REACH SVHC="No SVHC", Termination=SMD/SMT, Thickness=0.053inch, Voltage Rating=16V, Voltage Rating (DC)=16V, Width=1.25mm
ESP32: library part CMP-194065-000003-1, "WIFI MODULE 32MBITS SPI FLASH", Manufacturer="Espressif Systems", Max Frequency=2484MHz, Max Supply Voltage=3.6V, Min Supply Voltage=3V, Nominal Supply Current=500mA, Temperature="-40°C to +85°C", Temperature Range High=+85°C, Temperature Range Low=-40°C, Automotive=No, Bandwidth=72MHz, Category=UNK, ComponentLink2Description=Datasheet, ComponentLink2URL=https://www.espressif.com/sites/default/files/documentation/esp32-wroom-32d_esp32-wroom-32u_datasheet_en.pdf, Data Rate=150Mbits/s, Device Class L1="Integrated Circuits (ICs)", Device Class L2="RF Semiconductors and Devices", Device Class L3=Transceivers, Digikey Description="WIFI MODULE 32MBITS SPI FLASH", Height=3.2mm, Interface=I2C,SPI,UART,Ethernet,I2S,Other, Lead Free=Yes, Manufacturer Part Number=ESP32-WROOM-32D, Mouser Description="Wi-Fi/BT BLE Module ESP32-D0WD, SPI Flash, UART, P", Number Of Adc Channels=16, Number Of Gpio=32, Octopart=https://octopart.com/esp32-wroom-32d-espressif+systems-91040050, Package=ESP32-WROOM-32D, RoHS=TRUE, Sensitivity=-98dBm
ESP32_BOOT ESP32_RESET: library part CMP-2100-03586-2, "SWITCH TACTILE SPST-NO 0.05A 12V", Contact Current Rating=50mA, Contact Resistance=100mR, Insulation Resistance=100MR, Max Operating Temperature=70°C, Max Voltage Rating (DC)=12V, Min Operating Temperature=-25°C, Operating Force=1.5N, Package Quantity=1, Ratings="Dust Proof", Actuator Length=0.4mm, Actuator Type=Standard, Contact Material=Silver, Current Rating=50mA, Depth=2.5mm, Electrical Life=200000Cycles, Height=1.2mm, Illumination Type=Non-Illuminated, Lead Free="Lead Free", Length=4mm, Max Current Rating=50mA, Mechanical Life=200000Cycles, Mount="Surface Mount", Orientation=Straight, Packaging="Tape and Reel", Switch Function=Off-Mom, Switch Travel=0.15mm, Termination=SMD/SMT, Throw Configuration=SPST, Voltage Rating (DC)=12V, Weight=0.000776oz, Width=3mm
F1: library part CMP-08605-000049-1, "FUSE BRD MNT 3A 32VAC 35VDC 1206", Fuse Current=3A, Fuse Interrupt Ac Current=50A, Fuse Voltage Drop=0.14V, Manufacturer="Littelfuse Inc", Max Fuse Ac Voltage=32V, Max Fuse Dc Voltage=35V, Package=437, Resistance=0.033Ω, Temperature="-55°C to +150°C", Temperature Range High=+150°C, Temperature Range Low=-55°C, Automotive=No, Category=Fuse, ComponentLink2Description=Datasheet, ComponentLink2URL=https://www.littelfuse.com/~/media/electronics/datasheets/fuses/littelfuse_fuse_437_datasheet.pdf.pdf, Device Class L1="Circuit Protection", Device Class L2=Fuses, Device Class L3=unset, Digikey Description="FUSE BRD MNT 3A 32VAC 35VDC 1206", Fuse Blow Speed=Fast, Fuse I2T=0.506A2Sec, Fuse Interrupt Dc Current=50A, Height=0.8639mm, Ipc Land Pattern Name=CAPC320163X82, Lead Free=Yes, Manufacturer Part Number=0437003.WR, Mouser Description="Surface Mount Fuses 32V FA 1206 3A", Octopart=https://octopart.com/0437003.wr-littelfuse-8600121, RoHS=TRUE, Voltage Rating=32V
Q1 Q2: library part CMP-1048-00417-1, "General Purpose Transistor, NPN Silicon, 3-Pin SC-75, Pb-Free, Tape and Reel", Manufacturer="On Semiconductor", ComponentLink1Description="Manufacturer URL", ComponentLink1URL=http://www.onsemi.com/, ComponentLink2Description=Datasheet, ComponentLink2URL=http://www.onsemi.cn/pub_link/Collateral/MMBT2222ATT1-D.PDF, ComponentLink3Description="Package Specification", ComponentLink3URL=http://www.onsemi.com/pub_link/Collateral/463-01.PDF, DatasheetVersion="Rev. 5", fT Min (MHz)=300, IC Continuous (A)=0.6, Mounting Technology="Surface Mount", PackageDescription="3-Pin Small Outline Transistor, Body 1.6 x 0.8 mm, Pitch 0.5 mm", PackageReference=SC-75-3-463-01, PackageVersion="Rev. F, 07/2005", Packing="Tape and Reel", PartNumber=MMBT2222ATT1G, Polarity=NPN, RoHS=TRUE
R1 R2 R8 R12 R13: library part CMP-2001-00590-1, Manufacturer=Panasonic, Part Number=ERA6AEB123V
R3 R4: library part CMP-2100-03671-1, "Chip Resistor, 1 KOhm, +/- 1%, 125 mW, -55 to 155 degC, 0805 (2012 Metric), RoHS, Tape and Reel", Case Code (Imperial)=0805, Case Code (Metric)=2012, Manufacturer=Yageo, Max Operating Temperature=155degC, Max Power Dissipation=125mW, Min Operating Temperature=-55degC, Package Description="2-Pin Surface Mounted Device, Body 2 x 1.25 mm", Package Quantity=1, Resistance=1KOhm, Temperature Coefficient=100ppm/degreesC, Tolerance=1%, Voltage Rating=150V, Case/Package=0805, Composition=ThickFilm, Datasheet URL=http://www.yageo.com/NewPortal/yageodocoutput?fileName=/pdf/R-Chip/PYu-RC_Group_51_RoHS_L_5.pdf, Datasheet Version="Rev. 5, 10/2016", Depth=1.25mm, Height=0.024inch, Lead Free=LeadFree, Length=0.079inch, Manufacturer URL=http://www.yageo.com/, Military Standard=Not, Number of Pins=2, Number of Terminations=2, Package Reference=0805, Packaging=TapeandReel, Power Rating=125mW, REACH SVHC=Unknown, RoHSCompliant=true, Termination=SMD/SMT, Voltage Rating (DC)=150V, Width=0.049inch
R5: library part CMP-1568-00001-1, "General Puprose Chip Resistor, 4700 Ohm +/- 1%, 0.125 W, -55 to 155 degC, 2-Pin SMD, RoHS, Tape and Reel", PartNumber=RC0805FR-074K7L, Power="0.125 W", Resistance="4700 Ohm", Temperature Max="155 degC", Temperature Min="-55 degC", Tolerance="+/- 1%", ComponentLink1Description="Manufacturer URL", ComponentLink1URL=http://www.yageo.com/NewPortal/_en/index.jsp, ComponentLink2Description=Datasheet, ComponentLink2URL=http://www.yageo.com/documents/recent/PYu-RC_Group_51_RoHS_L-3.pdf, DatasheetVersion="Rev. 3", Mounting Technology="Surface Mount", PackageDescription="2-Pin Surface Mount Device, Body 2 x 1.25 mm", Packing="Tape and Reel", RoHS=TRUE
R6 R7: library part CMP-2000-06960-1, "Chip Resistor, 330 Ohm, +/- 1%, 125 mW, -55 to 155 degC, 0805 (2012 Metric), RoHS, Tape and Reel", Case Code - in=0805, Case Code - mm=2012, Manufacturer=Yageo, Operating Temperature Range=-55Cto+155C, Package Description="2-Pin Surface Mounted Device, Body 2 x 1.25 mm", Power Rating=125mW(1/8W), Resistance=330Ohms, Temperature Coefficient=100PPM/C, Tolerance=1%, Voltage Rating=150V, Datasheet URL=http://www.yageo.com/documents/recent/PYu-RC_Group_51_RoHS_L_7.pdf, Datasheet Version="Rev. 7, 05/2017", Manufacturer URL=http://www.yageo.com/, Mounting Technology=SurfaceMount, Package Reference=0805, Packaging=Reel, Product=ThickFilmResistorsGeneralPurpose, Series=RC, Termination Style=SMD/SMT
R14 R15 R16 R17 R19 R20: library part CMP-2001-00612-1, Manufacturer=Panasonic, Part Number=ERA6AEB221V
R14B R15B R16B R17B R18: library part CMP-1659-00013-4, "Chip Resistor, 10 KOhm, +/- 1%, 0.125 W, -55 to 155 degC, 0805 (2012 Metric), RoHS, Tape and Reel", Manufacturer=Yageo, Max Operating Temperature="155 degC", Min Operating Temperature="-55 degC", Package Quantity=5000, Voltage Rating="150 V", ComponentLink1Description="Manufacturer URL", ComponentLink1URL=http://www.yageo.com/, ComponentLink2Description=Datasheet, ComponentLink2URL=http://www.yageo.com/documents/recent/PYu-RC_Group_51_RoHS_L_04.pdf, DatasheetVersion="Rev. 4, 02/2016", Height="0.5 mm", Length="2 mm", Mount="Surface Mount", Mounting Technology="Surface Mount", PackageDescription="2-Pin Surface Mounted Device, Body 2 x 1.25 mm", PackageReference=0805, Packaging="Tape and Reel", Pins=2, REACH SVHC="No SVHC", RoHSCompliant=true
R21 R22 R23 R24 R25 R26: library part CMP-2100-03667-1, "Chip Resistor, 0 Ohm, +/- 5%, 0.1 W, -55 to 155 degC, 0603 (1608 Metric), RoHS, Tape and Reel", Case Code (Imperial)=0603, Case Code (Metric)=1608, Manufacturer=Yageo, Max Operating Temperature=155degC, Min Operating Temperature=-55degC, Package Description="2-Pin Surface Mount Device, Body 1.6 x 0.8 mm", Package Quantity=5000, Power Rating=100mW, Resistance=0mOhm, Temperature Coefficient=200ppm/degreesC, Tolerance=5%, Voltage Rating=50V, Case/Package=0603, Composition=ThickFilm, Contact Plating=Tin, Datasheet URL=http://www.yageo.com/NewPortal/yageodocoutput?fileName=/pdf/R-Chip/PYu-RC_Group_51_RoHS_L_5.pdf, Datasheet Version="Rev. 5, 10/2016", Depth=0.8mm, Height=0.45mm, Lead Free=LeadFree, Length=1.6mm, Manufacturer URL=http://www.yageo.com/, Military Standard=Not, Number of Pins=2, Package Reference=0603, Packaging=TapeandReel, Radiation Hardening=No, REACH SVHC=NoSVHC, RoHSCompliant=true, Termination=SMD/SMT, Voltage Rating (DC)=50V, Width=0.8mm
RA1 RA2: library part CMP-2000-06067-1, "CAT / CAY 16 Series - Chip Resistor Array, 10 KOhm, +/- 5%, 50 V, -55 to 125 degC, 8-Pin SMD, RoHS, Tape and Reel", Manufacturer=Bourns, Number of Resistors=4, Operating Temperature=-55°C~125°C, Package / Case=1206(3216Metric),Concave,LongSideTerminals, Package Description="8-Pin Surface Mount Device, Body 3.2 x 1.55 mm, Pitch 0.8 mm", Power Per Element=62.5mW, Resistance (Ohms)=10k, Standard Package=1, Supplier Device Package=1206, Temperature Coefficient=±200ppm/°C, Tolerance=±5%, Applications=-, Category=Resistors, Circuit Type=Isolated, Datasheet URL=http://www.mouser.com/ds/2/54/ATCAY-777361.pdf, Datasheet Version=09/2014, EDA / CAD Models=DownloadfromAcceleratedDesigns, Family=ResistorNetworks,Arrays, Height="0.024\"(0.60mm)", Manufacturer URL=http://www.bourns.com/, Mounting Technology=SurfaceMount, Mounting Type=SurfaceMount, Number of Pins=8, Online Catalog=CAT16Series, Other Names=CAT16-103J4LFDKR, Package Reference=CAT16-103J4LF, Packaging=Digi-Reel®, RoHS Information=CAT16MaterialDeclaration, Series=CAT16, Size / Dimension="0.126\"Lx0.061\"W(3.20mmx1.55mm)"
Rasen1 Rasen2 Rasen3 Rasen4 Rbsen1 Rbsen2 Rbsen3 Rbsen4: library part CMP-2003-04364-1, Manufacturer="Vishay Dale", Part Number=WSL1206R0600FEA
Rusb1 Rusb2: library part CMP-2000-04091-1, Manufacturer=Yageo, Part Number=RC0603FR-075K1L
RX TX: library part CMP-1426-00012-1, "SMD mono-color Chip LED, WL-SMCW, Yellow", Color=Yellow, Manufacturer="Wuerth Elektronik", ComponentLink1Description="Manufacturer URL", ComponentLink1URL=http://www.we-online.com, ComponentLink2Description=Datasheet, ComponentLink2URL=http://katalog.we-online.com/led/datasheet/150080YS75000.pdf, PackageReference=0805_A, PartNumber=150080YS75000
SERVO1+2: library part CMP-1502-01069-1, "THT Angled Pin Header WR-PHD, Pitch 2.54 mm, Single Row, 6 pins", Contact Resistance=20mOhm, Manufacturer="Wurth Elektronik", Operating Temperature=-40to105degC, Rated Current=3A, Withstanding Voltage=500VAC, Working Voltage=250VAC, Datasheet URL=https://katalog.we-online.de/em/datasheet/6130xx11021.pdf, Gender=Male, Manufacturer URL=http://www.we-online.de, Mounting Technology=THT, Orientation=Angled, Package Reference=61300611021, Packaging=Bag, Part Number=61300611021, Pin Number=6, Pitch=2.54mm, Publisher=WurthElektronik, Row Number=Single
U1: library part CMP-0511-00004-2, "IC SGL USB-TO-UART BRIDGE 24QFN", Case/Package=QFN, Max Operating Temperature=85°C, Max Supply Voltage=3.6V, Min Operating Temperature=-40°C, Min Supply Voltage=3V, Operating Supply Current=17mA, Operating Supply Voltage=3.3V, Contact Plating=Tin, Data Rate=2Mbps, Number Of Channels=1, Number of Pins=24, Number of Transceivers=1, Packaging=Rail/Tube, Radiation Hardening=No, Weight=0.001764oz
U2: library part CMP-0326-00038-4, "TVS DIODE 5.5V 6SON", Breakdown Voltage=24V, Capacitance=15pF, Max Operating Temperature=85°C, Max Power Dissipation=60W, Min Breakdown Voltage=6V, Min Operating Temperature=-40°C, Operating Supply Voltage=950mV, Package Quantity=5000, Peak Pulse Current=3A, Test Current=1mA, Working Voltage=19V, Depth=1mm, Direction=Unidirectional, ESD Protection=Yes, Height=0.55mm, Interface=USB, Lead Free="Lead Free", Length=1.45mm, Number Of Channels=4, Number of Circuits=4, Number of Pins=6, Packaging="Tape and Reel", Peak Pulse Power=60W, Polarity=Unidirectional, Radiation Hardening=No, REACH SVHC="No SVHC", Termination=SMD/SMT, Width=1.05mm
U3 U4 U5 U6: library part CMP-1529-00001-2, "2 A Low Voltage Dual Brushed DC or Single Bipolar Stepper Motor Driver (PWM Ctrl), 2.7 to 10.8 V, -40 to 85 degC, 16-Pin SOP (PW), Green (RoHS & no Sb/Br), Tape and Reel", Manufacturer="Texas Instruments", Package Reference=PW0016A, Peak Output Current="2 A", RMS Output Current="1.5 A", Temperature Range="-40 to 85 degC", ComponentLink1Description="Manufacturer URL", ComponentLink1URL=www.ti.com, ComponentLink2Description=Datasheet, ComponentLink2URL=http://www.ti.com/lit/ds/symlink/drv8833.pdf, ComponentLink3Description="Package Specification", ComponentLink3URL=http://www.ti.com/lit/ml/mpds361/mpds361.pdf, Control I/F=PWM, DatasheetVersion=SLVSAR1D, Eco-Plan="Green (RoHS & no Sb/Br)", Mounting Technology="Surface Mount", PackageDescription="16-Pin Plastic Small Outline, Body 4.4 x 5 mm, Pitch 0.65 mm", PackageVersion=4040064-4/G, Packing="Tape and Reel", PartNumber=DRV8833PWR, rDS (ON) (LS + HS)="360 mOhms", Vs="2.7 V Min."
U7 U8 U9: library part CMP-0133-00145-1, "Miniature Single-Cell, Fully Integrated Li-Ion, Li-Polymer Charge Management Controller, 4.35V, 5-Pin SOT-23, Industrial Temperature, Tape and Reel", Code_IPC=SOT23-5, DatasheetVersion="revE, Sep-2008", PackageDescription="5-Lead Plastic Small Outline Transistor (OT) [SOT-23]", PackageReference=SOT-23-OT5, PackageVersion="revBB, Aug-2009"
U10: library part CMP-1595-00004-2, "16-Channel, 12-Bit PWM Fm+ I2C-Bus LED Controller, 2.3 to 5.5 V, -40 to 85 degC, 28-Pin TSSOP (SOT361-1), RoHS, Tape and Reel", Frequency="25000000 Hz", PartNumber=PCA9685, Supply Current Max="10 mA", Supply Voltage Max="5.5 V", Supply Voltage Min="2.3 V", Temperature Max="85 degC", Temperature Min="-40 degC", Code_JEDEC=MO-153, ComponentLink1Description="Manufacturer URL", ComponentLink1URL=http://www.nxp.com/, ComponentLink2Description=Datasheet, ComponentLink2URL=http://www.nxp.com/documents/data_sheet/PCA9685.pdf, ComponentLink3Description="Package Specification", ComponentLink3URL=http://www.nxp.com/documents/outline_drawing/sot361-1_po.pdf, DatasheetVersion="Rev. 4", Mounting Technology="Surface Mount", PackageDescription="28-Pin Small Outline Package, Body 9.7 x 4.4 mm, Pitch 0.65 mm", PackageVersion=02/2003, Packing="Tape and Reel", RoHS=TRUE
U11 U12: library part CMP-0244-00213-1, "Positive Voltage Regulator, 3-Pin D2PAK, Tape and Reel", ComponentLink1Description="Manufacturer URL", ComponentLink1URL=http://www.st.com, ComponentLink2Description=Datasheet, ComponentLink2URL=http://www.st.com/internet/com/TECHNICAL_RESOURCES/TECHNICAL_LITERATURE/DATASHEET/CD00000444.pdf, DatasheetVersion=16/11/2011, PackageDescription="3-Pin Transistor Outline Package 2.54 mm Pitch, 15.4 mm Lead Span (D2PAK)", PackageReference=TO-263, PackageVersion=2011
U13: library part CMP-12756-000035-1, "IC REG LINEAR 3.3V 600MA SOT25", Case/Package=SOT-23-5, Dropout Voltage=250mV, Max Input Voltage=6V, Max Operating Temperature=85°C, Max Output Current=600mA, Min Input Voltage=2.5V, Min Operating Temperature=-40°C, Output Voltage=3.3V, Package Quantity=1, Quiescent Current=55uA, Accuracy=1.5%, Height=1.3mm, Lead Free="Lead Free", Length=3.1mm, Mount="Surface Mount", Number of Outputs=1, Number of Pins=5, Number of Regulators=1, Output Current=600mA, Output Type=Fixed, Packaging="Tape and Reel", Polarity=Positive, Width=1.7mm
USB-C: library part CMP-196119-000001-1, "CONN RCPT USB2.0 TYPEC 16POS", Current Rating=4.25A, Manufacturer="Global Connector Technology", Package=0, Temperature="-40°C to +85°C", Temperature Range High=+85°C, Temperature Range Low=-40°C, Voltage Rating=20V, Automotive=No, Category=Conn, ComponentLink2Description=Datasheet, ComponentLink2URL=https://gct.co/files/drawings/usb4085.pdf, Conn Orientation="Right Angle", Contact Material=Gold,Nickel, Device Class L1=Connectors, Device Class L2="USB Connectors", Device Class L3=unset, Digikey Description="CONN RCPT USB2.0 TYPEC 16POS", Height=3.66mm, Is Female=yes, Lead Free=Yes, Manufacturer Part Number=USB4085-GF-A, Number Of Contacts=16, Octopart=https://octopart.com/usb4085-gf-a-global+connector+technology-94773699, Pitch=0.85mm, RoHS=TRUE, Shielding=true, Usb Standard="USB 2.0"

## Free pads (board coordinates)
  round 6 hole 3.5: 3(3.5,3.5) 3(3.5,26.5) 3(58.5,3.5) 3(58.5,26.5)

## Via types
v1: diameter 0.508, hole 0.254, TOP_PWR to SIGNAL, 74 vias

## Nets (pads, with @x,y where several pads share a name; then routed paths per layer and width w, separated by ;. In a path a pad name is that pad's centre, name@x,y a point inside that pad or via, vN(x,y) a via of type N, cw(c..) or ccw(c..) an arc to the next point about the centre after c; other vN are vias at no path point)
+3V3: C4.2 C5.1 C7.1 C26.1 ESP32.2 R3.1 R5.2 R6.2 R7.2 R12.2 R13.2 U1.5 U1.6 U1.7 U13.5 | length 2.9
  TOP_PWR w0.254: C4.2@11.45,13.05 C4.2
  SIGNAL w0.254: U13.5 34.977,1.55 C26.1
  other v1: 7.9,12.75
+5_USB_IN: C1.1 F1.1 U2.6 USB-C.A4 USB-C.A9 USB-C.B4 USB-C.B9 | length 22.9
  TOP_PWR w0.254: F1.1 3.75,17.7 4.325,17.125 USB-C.B9 USB-C.A4 8.425,17.125 9.3,16.25 U2.6 ; C1.1 4.175,9.875 3.6,10.45 3.6,12.3 4.175,12.875 USB-C.B4 USB-C.A9
  SHIELD_GND w0.254: USB-C.B4 4.25,13.8 4.25,16.2 USB-C.B9
+5V: C2.1 C3.1 C20.1 C22.1 C25.1 F1.2 R4.1 R8.2 R14B.1 R15B.1 R16B.1 R17B.1 R21.2 R22.2 R23.2 R24.2 R25.2 R26.2 RA2.5 RA2.6 U1.8 U10.28 U11.3 U13.1 | length 28.4
  TOP_PWR w0.254: F1.2 C2.1 10.1,21 v1(10.4,20.7) ; v1(12.804,11.675) C3.1 U1.8
  SHIELD_GND w0.254: v1(10.4,20.7) 9.15,20.7 8.2,19.75 8.2,13.4 9.925,11.675 v1(12.804,11.675)
  SIGNAL w0.254: -2.475,36.75 -2.468,36.743 ; C25.1 27.023,1.55 U13.1@29.254,1.55 ; R8.2 27.9,4 28.3,3.6 28.3,2.504 U13.1@29.254,1.55 ; U13.1 U13.1@29.254,1.55
+5V_SERVO: C24.1 SERVO1+2.2 SERVO1+2.5 U12.3
BAT_PACK_4V2: BAT4.2.1 BAT8.4.2 U8.2 U9.3
BAT_PACK_8V4: BAT8.4.1 BAT12.6.2 U7.2 U8.3
BAT_PACK_12V6: BAT12.6.1 C8.1 C9.2 C11.1 C12.2 C14.1 C15.2 C17.1 C18.2 C21.1 C23.1 MOTOR1.VCC MOTOR2.VCC MOTOR3.VCC MOTOR4.VCC U3.12 U4.12 U5.12 U6.12 U7.3 U11.1 U12.1
  other v1: -7.15,34 -6.15,34 -7.15,34.75 -6.15,34.75 -7.15,35.5 -6.15,35.5 59.1,44.9 60.35,44.9 59.1,45.65 60.35,45.65 59.1,46.4 60.35,46.4 59.1,50.6 60.35,50.6 59.1,51.35 60.35,51.35 59.1,52.1 60.35,52.1
CHARGE_ENABLE: ESP32.9
ESP32-I2C-SCL: ESP32.36 RA2.3 U10.26
ESP32-I2C-SDA: ESP32.33 RA2.4 U10.27
ESP32_RX: ESP32.34 U1.21 | length 26.7
  TOP_PWR w0.254: U1.21 15.25,18.1 15.8,18.65 v1(17.9,18.65) ; v1(36.6,18.65) 36.6,17.9 37.32,17.18 ESP32.34
  SIGNAL w0.254: v1(17.9,18.65) v1(36.6,18.65)
ESP32_TX: ESP32.35 U1.20 | length 24.8
  TOP_PWR w0.254: U1.20 15.75,17.7 15.95,17.9 v1(17.9,17.9) ; v1(37.43,18.45) ESP32.35
  SIGNAL w0.254: v1(17.9,17.9) 36.88,17.9 v1(37.43,18.45)
GND: 3V3.1 5V.1 BAT4.2.2 BAT4.2.MP1 BAT4.2.MP2 BAT8.4.MP1 BAT8.4.MP2 BAT12.6.MP1 BAT12.6.MP2 C1.2 C2.2 C3.2 C4.1 C5.2 C6.2 C7.2 C9.1 C10.1 C12.1 C13.1 C15.1 C16.1 C18.1 C19.1 C20.2 C21.2 C22.2 C23.2 C24.2 C25.2 C26.2 ESP32.1 ESP32.15 ESP32.38 ESP32.39 ESP32_BOOT.1 ESP32_RESET.1 MOTOR1.GND MOTOR2.GND MOTOR3.GND MOTOR4.GND pad.3 R18.2 RA1.1 RA1.2 RA1.3 RA1.4 RA2.1 RA2.2 Rasen1.1 Rasen2.1 Rasen3.1 Rasen4.1 Rbsen1.1 Rbsen2.1 Rbsen3.1 Rbsen4.1 Rusb1.1 Rusb2.1 SERVO1+2.1 SERVO1+2.4 U1.2 U1.25 U2.4 U3.13 U4.13 U5.13 U6.13 U9.2 U10.14 U10.25 U11.4 U12.4 U13.2 USB-C.1 USB-C.2 USB-C.3 USB-C.4 USB-C.A1 USB-C.A12 USB-C.B1 USB-C.B12
GPIO0: ESP32.25 ESP32_BOOT.2 Q2.3 R13.1
"GPIO5 / VSPI_CS": ESP32.29
MOTOR1_CHA: MOTOR1.C1 U3.2 U3.7
  other v1: -4.45,41 -1.2,41 -4.425,42.35 -1.175,42.35 -4.45,43.5
MOTOR1_CHB: MOTOR1.C2 U3.4 U3.5
MOTOR1_PWM_A: ESP32.27 U3.9 U3.16 | length 32.6
  TOP_PWR w0.254: -5.075,36.65 -5.075,38.075 -4.3,38.85 -1,38.85 -0.525,38.375 -0.525,36.65 v1(0.75,36.65) ; v1(31.5,20.15) 33,18.65 33,12.5 37.21,8.29 ESP32.27
  SIGNAL w0.254: 25.116,19.65 25.616,20.15 v1(31.5,20.15)
MOTOR1_PWM_B: ESP32.28 U3.10 U3.15 | length 24.3
  TOP_PWR w0.254: -4.425,36.65 -4.425,37.925 -3.9,38.45 -1.55,38.45 -1.175,38.075 -1.175,36.65 -1.175,35.725 -0.95,35.5 0.3,35.5 v1(0.75,35.95) ; v1(32.55,20.15) 33.6,19.1 33.6,13.1 37.14,9.56 ESP32.28
MOTOR2_CHA: MOTOR2.C1 U4.2 U4.7
  other v1: -17.25,5.2 -20.5,6.55 -17.25,6.55 -20.5,7.9 -17.225,7.9
MOTOR2_CHB: MOTOR2.C2 U4.4 U4.5
MOTOR2_PWM_A: ESP32.30 U4.9 U4.16 | length 29.8
  TOP_PWR w0.254: -21.15,12.25 -21.15,10.825 -20.075,9.75 -17.275,9.75 -16.6,10.425 -16.6,12.25 -16.025,12.25 ; v1(37.2,12.75) 37.85,12.1 ESP32.30
  SIGNAL w0.254: 22.425,4.725 27.35,9.65 34.1,9.65 v1(37.2,12.75)
MOTOR2_PWM_B: ESP32.31 U4.10 U4.15 | length 28
  TOP_PWR w0.254: -20.5,12.25 -20.5,10.875 -19.825,10.2 -17.825,10.2 -17.25,10.775 -17.25,12.25 ; v1(37.2,13.95) 37.78,13.37 ESP32.31
  SIGNAL w0.254: 21.875,5.375 27.05,10.55 33.8,10.55 v1(37.2,13.95)
MOTOR3_CHA: MOTOR3.C1 U5.2 U5.7
  other v1: 54.3,57.5 57.55,57.5 54.325,58.85 57.575,58.85 54.3,60
MOTOR3_CHB: MOTOR3.C2 U5.4 U5.5
MOTOR3_PWM_A: ESP32.37 U5.9 U5.16 | length 8.2
  TOP_PWR w0.254: 53.675,53.15 53.675,54.575 54.45,55.35 57.75,55.35 58.225,54.875 58.225,53.15
MOTOR3_PWM_B: ESP32.10 U5.10 U5.15 | length 6.3
  TOP_PWR w0.254: 54.325,53.15 54.325,54.425 54.85,54.95 57.2,54.95 57.575,54.575 57.575,53.15
MOTOR4_CHA: MOTOR4.C1 U6.2 U6.7
  other v1: 57.575,36.8 54.325,38.15 57.575,38.15 54.325,39.5 57.6,39.5
MOTOR4_CHB: MOTOR4.C2 U6.4 U6.5
MOTOR4_PWM_A: ESP32.11 U6.9 U6.16 | length 8.5
  TOP_PWR w0.254: 53.675,43.85 53.675,42.425 54.75,41.35 57.55,41.35 58.225,42.025 58.225,43.85
MOTOR4_PWM_B: ESP32.12 U6.10 U6.15 | length 6.6
  TOP_PWR w0.254: 54.325,43.85 54.325,42.475 55,41.8 57,41.8 57.575,42.375 57.575,43.85
MOTOR_DRV_ENABLE: ESP32.8 R14.1 R15.1 R16.1 R17.1
Net3V3_2: 3V3.2 R3.2
Net5V_2: 5V.2 R4.2
NetC6_1: C6.1 U1.16 | length 1.8
  TOP_PWR w0.254: U1.16 C6.1
NetC8_2: C8.2 U3.11 | length 6
  TOP_PWR w0.254: C8.2 -5.7,38.15 -5.15,38.7 v1(-5.15,39.1) ; -3.775,36.65 -3.775,37.625 v1(-3.5,37.9)
  SHIELD_GND w0.254: v1(-5.15,39.1) -4,39.1 -3.5,38.6 v1(-3.5,37.9)
NetC10_2: C10.2 U3.14 | length 6.1
  TOP_PWR w0.254: v1(-2.5,37.9) -2,37.9 -1.825,37.725 -1.825,36.65 ; v1(0.1,38) C10.2
  SHIELD_GND w0.254: v1(-2.5,37.9) -1.95,38.45 -0.35,38.45 v1(0.1,38)
NetC11_2: C11.2 U4.11 | length 8.1
  TOP_PWR w0.254: C11.2@-22.725,10.75 -21.725,10.75 -20.924,9.949 -20.924,9.399 v1(-20.875,9.35) ; v1(-18.981,10.75) -18.275,10.75 -17.9,11.125 -17.9,12.25
  SHIELD_GND w0.254: v1(-20.875,9.35) -19.575,9.35 -18.981,9.944 v1(-18.981,10.75)
NetC13_2: C13.2 U4.14 | length 7.2
  TOP_PWR w0.254: v1(-16.375,9.9) -16.375,9.969 -16.025,10.319 -16.025,11.15 -15.775,11.4 C13.2
  SHIELD_GND w0.254: -19.85,12.25 -18.725,12.25 v1(-16.375,9.9)
NetC14_2: C14.2 U5.11 | length 7.3
  TOP_PWR w0.254: 54.975,53.15 54.975,54.125 v1(55.25,54.4) ; v1(58.95,54.75) C14.2
  SHIELD_GND w0.254: v1(55.25,54.4) 56.1,53.55 57.75,53.55 v1(58.95,54.75)
NetC16_2: C16.2 U5.14 | length 7.8
  TOP_PWR w0.254: C16.2 52.1,55.001 52.249,55.15 53.2,55.15 v1(53.7,55.65) ; v1(56.25,54.4) 56.75,54.4 56.925,54.225 56.925,53.15
  SHIELD_GND w0.254: v1(53.7,55.65) 55,55.65 v1(56.25,54.4)
NetC17_2: C17.2 U6.11 | length 7.3
  TOP_PWR w0.254: v1(56.1,42.35) 56.7,42.35 56.925,42.575 56.925,43.85 ; v1(58.35,41.3) 59.3,42.25 C17.2
  SHIELD_GND w0.254: v1(56.1,42.35) 57.3,42.35 v1(58.35,41.3)
NetC19_2: C19.2 U6.14 | length 4.5
  TOP_PWR w0.254: C19.2 52.1,44.2 v1(52.4,44.5)
  SHIELD_GND w0.254: v1(52.4,44.5) 54.325,44.5 v1(54.975,43.85)
NetQ1_1: Q1.1 R1.1
NetQ2_1: Q2.1 R2.1
NetR5_1: R5.1 U1.9 | length 3.6
  TOP_PWR w0.254: U1.9 14.752,13.023 14.752,12.497 14.899,12.35 15.05,12.35 15.4,12 15.4,11 15.65,10.75 R5.1
NetR6_1: R6.1 TX.2
NetR7_1: R7.1 RX.2
NetR8_1: R8.1 U13.3 | length 1.8
  SIGNAL w0.254: U13.3 R8.1@29.799,5.249
NetR14_2: R14.2 R14B.2 U3.1 | length 3.9
  TOP_PWR w0.254: -0.525,42.35 R14B.2 R14.2
NetR15_2: R15.2 R15B.2 U4.1 | length 4.2
  TOP_PWR w0.254: R15.2 R15B.2 -21.15,6.55
NetR16_2: R16.2 R16B.2 U5.1 | length 3.9
  TOP_PWR w0.254: 58.225,58.85 60.05,58.85 R16B.2 R16.2
NetR17_2: R17.2 R17B.2 U6.1 | length 3.6
  TOP_PWR w0.254: R17.2 52.05,38.2 R17B.2 53.675,38.15
NetR18_1: R18.1 U10.23
NetR19_1: R19.1 U10.6
NetR20_1: R20.1 U10.7
NetRasen1_2: Rasen1.2 U3.6 | length 8.9
  TOP_PWR w0.254: Rasen1.2 -9.15,40.9 -8.75,41.3 -5.75,41.3 -4.8,40.35 -4,40.35 -3.75,40.6 -3.75,42.325 -3.775,42.35
NetRasen2_2: Rasen2.2 U4.6 | length 8.8
  TOP_PWR w0.254: -17.9,6.55 -17.9,8.075 -17.375,8.6 -16.475,8.6 -15.925,8.05 -12.525,8.05 -12.225,8.35 Rasen2.2
NetRasen3_2: Rasen3.2 U5.6 | length 8.8
  TOP_PWR w0.254: Rasen3.2@49.575,56.375 49.575,57.425 49.975,57.825 52.975,57.825 53.925,56.875 54.725,56.875 54.975,57.125 54.975,58.85
NetRasen4_2: Rasen4.2 U6.6 | length 9.2
  TOP_PWR w0.254: 56.925,37.85 56.925,39.775 57.25,40.1 58.15,40.1 58.9,39.35 62.3,39.35 62.6,39.65 Rasen4.2
NetRbsen1_2: Rbsen1.2 U3.3 | length 7
  TOP_PWR w0.254: Rbsen1.2 -2.3,39.85 -1.825,40.325 -1.825,42.35
NetRbsen2_2: Rbsen2.2 U4.3 | length 7.6
  TOP_PWR w0.254: -19.85,6.55 -19.85,8.775 -19.275,9.35 Rbsen2.2
NetRbsen3_2: Rbsen3.2 U5.3 | length 7